# EAGLE board PogoBoardnosch (EAGLE 6.6.0)
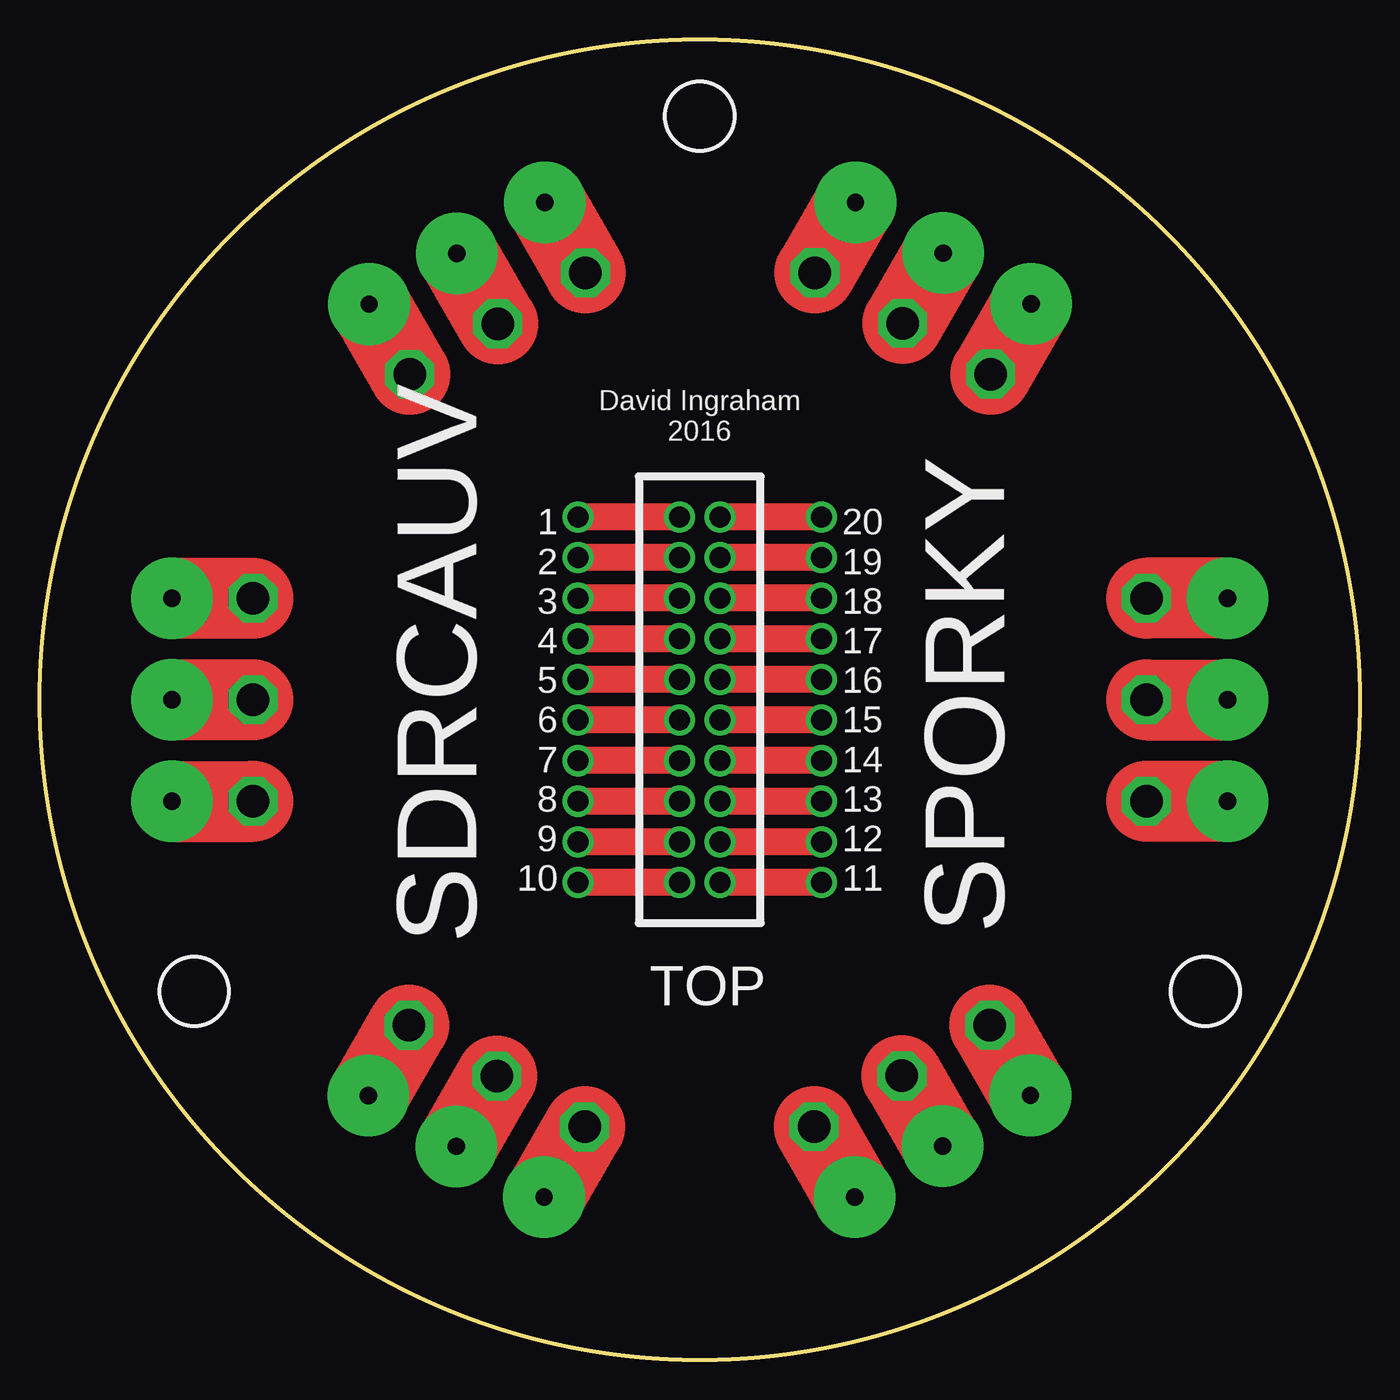
[diagram p0: board, top side]
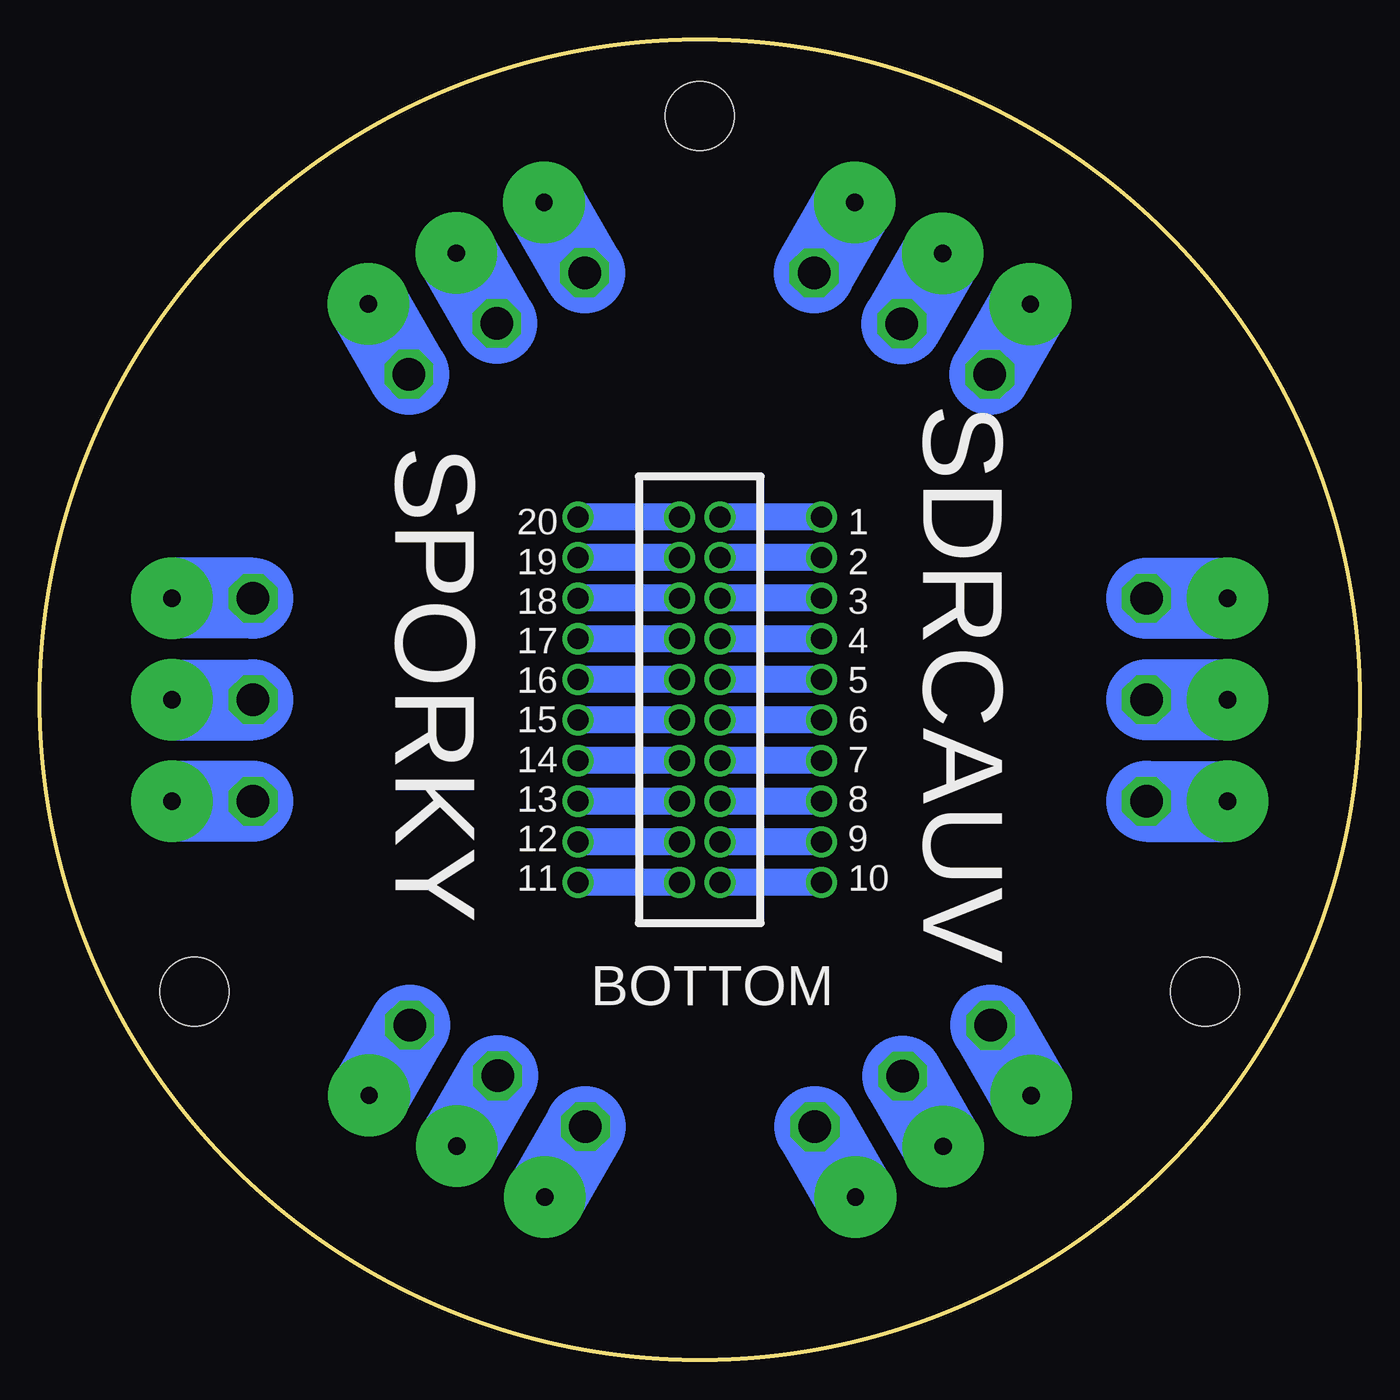
[diagram p1: board, bottom side, seen from below]

Size 82.55 x 82.55 mm. Coordinates in mm from the lower left corner, seen from the top.
Outline: circle at 41.27,41.27 radius 41.27
Copper layers (1*16): Top 0.0356mm / dielectric 1.5011mm / Bottom 0.0356mm
Design rules "OshPark_2layer": minimum track width 6mil, minimum drill 13mil, track to track 6mil, track to pad 6mil, pad to pad 6mil, via to via 6mil, smd to smd 6mil, copper to edge 15mil, drill to drill 6mil, minimum pad ring 7mil, minimum via ring 7mil, stop-mask expansion 3mil, vias tented up to drill 0mil, thermal gap 10mil
Holes 4.32 mm at 41.27,77.79 72.9,23.02 9.65,23.02

## Footprints (pad centres in the part's own frame; a part is rotated, then mirrored left to right if it is on the bottom)
SPRING_PIN_5MM = drill 1.09 pad 5.1: P$1 0,0
CON_100MIL_10 = drill 1.3: 1 0,11.43; 2 0,8.89; 3 0,6.35; 4 0,3.81; 5 0,1.27; 6 0,-1.27; 7 0,-3.81; 8 0,-6.35; 9 0,-8.89; 10 0,-11.43

## Placement (x,y rotation side)
E$1  [SPRING_PIN_5MM]  8.25,41.27 0 top
E$2  [SPRING_PIN_5MM]  8.25,47.62 0 top
E$3  [SPRING_PIN_5MM]  26.09,69.2 300 top
E$4  [SPRING_PIN_5MM]  31.59,72.37 300 top
E$5  [SPRING_PIN_5MM]  26.03,13.33 60 top
E$6  [SPRING_PIN_5MM]  20.54,16.51 60 top
E$7  [SPRING_PIN_5MM]  74.3,41.27 180 top
E$8  [SPRING_PIN_5MM]  74.3,34.92 180 top
E$9  [SPRING_PIN_5MM]  56.46,13.35 120 top
E$10  [SPRING_PIN_5MM]  50.96,10.18 120 top
E$11  [SPRING_PIN_5MM]  56.52,69.22 240 top
E$12  [SPRING_PIN_5MM]  62.01,66.04 240 top
E$13  [CON_100MIL_10]  40,41.27 0 top
E$14  [CON_100MIL_10]  42.55,41.27 0 top
E$15  [CON_100MIL_10]  48.89,41.27 0 top
E$16  [CON_100MIL_10]  33.66,41.27 0 top
S$1  [SPRING_PIN_5MM]  20.59,66.02 300 top
S$2  [SPRING_PIN_5MM]  31.53,10.16 60 top
S$3  [SPRING_PIN_5MM]  8.25,34.92 0 top
S$4  [SPRING_PIN_5MM]  74.3,47.62 180 top
S$5  [SPRING_PIN_5MM]  61.96,16.53 120 top
S$6  [SPRING_PIN_5MM]  51.02,72.39 240 top

## Library data of the parts
E$1-E$16 S$1-S$6 = dan

## Nets
S$1: E$2.P$1
S$2: E$1.P$1
S$3: S$3.P$1
S$4: E$4.P$1
S$5: E$3.P$1
S$6: S$1.P$1
S$7: E$6.P$1
S$8: E$5.P$1
S$9: S$2.P$1
S$10: E$8.P$1
S$11: E$7.P$1
S$12: S$4.P$1
S$13: E$10.P$1
S$14: E$9.P$1
S$15: S$5.P$1
S$16: E$12.P$1
S$17: E$11.P$1
S$18: S$6.P$1
S$19: E$13.1 E$16.1
S$20: E$13.2 E$16.2
S$22: E$13.3 E$16.3

## Tracks (layer width: path | path; a pad name or v marks a point on that pad's centre or on a via)
S$1  (via drill 2.03)
  Top 5.08: E$2.P$1 v13.33,47.62
  Bottom 5.08: v13.33,47.62 E$2.P$1
S$2  (via drill 2.03)
  Top 5.08: v13.33,41.27 E$1.P$1
  Bottom 5.08: E$1.P$1 v13.33,41.27
S$3  (via drill 2.03)
  Top 5.08: S$3.P$1 v13.33,34.92
  Bottom 5.08: v13.33,34.92 S$3.P$1
S$4  (via drill 2.03)
  Top 5.08: E$4.P$1 v34.13,67.97
  Bottom 5.08: v34.13,67.97 E$4.P$1
S$5  (via drill 2.03)
  Top 5.08: v28.63,64.8 E$3.P$1
  Bottom 5.08: E$3.P$1 v28.63,64.8
S$6  (via drill 2.03)
  Top 5.08: S$1.P$1 v23.13,61.62
  Bottom 5.08: v23.13,61.62 S$1.P$1
S$7  (via drill 2.03)
  Top 5.08: E$6.P$1 v23.08,20.91
  Bottom 5.08: v23.08,20.91 E$6.P$1
S$8  (via drill 2.03)
  Top 5.08: v28.57,17.73 E$5.P$1
  Bottom 5.08: E$5.P$1 v28.57,17.73
S$9  (via drill 2.03)
  Top 5.08: S$2.P$1 v34.07,14.56
  Bottom 5.08: v34.07,14.56 S$2.P$1
S$10  (via drill 2.03)
  Top 5.08: E$8.P$1 v69.22,34.92
  Bottom 5.08: v69.22,34.92 E$8.P$1
S$11  (via drill 2.03)
  Top 5.08: v69.22,41.27 E$7.P$1
  Bottom 5.08: E$7.P$1 v69.22,41.27
S$12  (via drill 2.03)
  Top 5.08: S$4.P$1 v69.22,47.62
  Bottom 5.08: v69.22,47.62 S$4.P$1
S$13  (via drill 2.03)
  Top 5.08: E$10.P$1 v48.42,14.57
  Bottom 5.08: v48.42,14.57 E$10.P$1
S$14  (via drill 2.03)
  Top 5.08: v53.92,17.75 E$9.P$1
  Bottom 5.08: E$9.P$1 v53.92,17.75
S$15  (via drill 2.03)
  Top 5.08: S$5.P$1 v59.42,20.92
  Bottom 5.08: v59.42,20.92 S$5.P$1
S$16  (via drill 2.03)
  Top 5.08: E$12.P$1 v59.47,61.64
  Bottom 5.08: v59.47,61.64 E$12.P$1
S$17  (via drill 2.03)
  Top 5.08: v53.97,64.82 E$11.P$1
  Bottom 5.08: E$11.P$1 v53.97,64.82
S$18  (via drill 2.03)
  Top 5.08: S$6.P$1 v48.48,67.99
  Bottom 5.08: v48.48,67.99 S$6.P$1
S$19
  Top 1.676: E$13.1 E$16.1 | 40,47.62 33.66,47.62
  Bottom 1.676: E$16.1 E$13.1
S$20
  Top 1.676: E$13.2 E$16.2
  Bottom 1.676: E$16.2 E$13.2
S$21
  Top 1.676: 40,45.09 33.66,45.09
  Bottom 1.676: 33.66,45.09 40,45.09
S$22
  Bottom 1.676: E$16.3 E$13.3
S$23
  Top 1.676: 40,42.55 33.66,42.55
  Bottom 1.676: 33.66,42.55 40,42.55
S$24
  Top 1.676: 40,40 33.66,40 | 40,34.92 33.66,34.92
  Bottom 1.676: 33.66,40 40,40
S$25
  Top 1.676: 40,37.46 33.66,37.46
  Bottom 1.676: 33.66,37.46 40,37.46
S$26
  Top 1.676: 40,32.38 33.66,32.38
  Bottom 1.676: 33.66,32.38 40,32.38
S$27
  Bottom 1.676: 33.66,34.92 40,34.92
S$28
  Top 1.676: 40,29.84 33.66,29.84
  Bottom 1.676: 33.66,29.84 40,29.84
S$29
  Top 1.676: 48.89,40 42.55,40 | 48.89,34.92 42.55,34.92
  Bottom 1.676: 42.55,40 48.89,40
S$30
  Top 1.676: 48.89,37.46 42.55,37.46
  Bottom 1.676: 42.55,37.46 48.89,37.46
S$31
  Top 1.676: 48.89,32.38 42.55,32.38
  Bottom 1.676: 42.55,32.38 48.89,32.38
S$32
  Bottom 1.676: 42.55,34.92 48.89,34.92
S$33
  Top 1.676: 48.89,29.84 42.55,29.84
  Bottom 1.676: 42.55,29.84 48.89,29.84
S$34
  Top 1.676: 48.89,52.7 42.55,52.7 | 48.89,47.62 42.55,47.62
  Bottom 1.676: 42.55,52.7 48.89,52.7
S$35
  Top 1.676: 48.89,50.16 42.55,50.16
  Bottom 1.676: 42.55,50.16 48.89,50.16
S$36
  Top 1.676: 48.89,45.09 42.55,45.09
  Bottom 1.676: 42.55,45.09 48.89,45.09
S$37
  Bottom 1.676: 42.55,47.62 48.89,47.62
S$38
  Top 1.676: 48.89,42.55 42.55,42.55
  Bottom 1.676: 42.55,42.55 48.89,42.55

## Text on the board
tPlace: David Ingraham / 2016 | SPORKY | 1 / 2 / 3 / 4 / 5 / 6 / 7 / 8 / 9 / 10 | 20 / 19 / 18 / 17 / 16 / 15 / 14 / 13 / 12 / 11 | SDRCAUV | TOP
bPlace: 1 / 2 / 3 / 4 / 5 / 6 / 7 / 8 / 9 / 10 | 20 / 19 / 18 / 17 / 16 / 15 / 14 / 13 / 12 / 11 | SPORKY | SDRCAUV | BOTTOM